# EAGLE board MTC2-N9151-BRK rev2-2a (Eagle) (EAGLE 7.5.0)
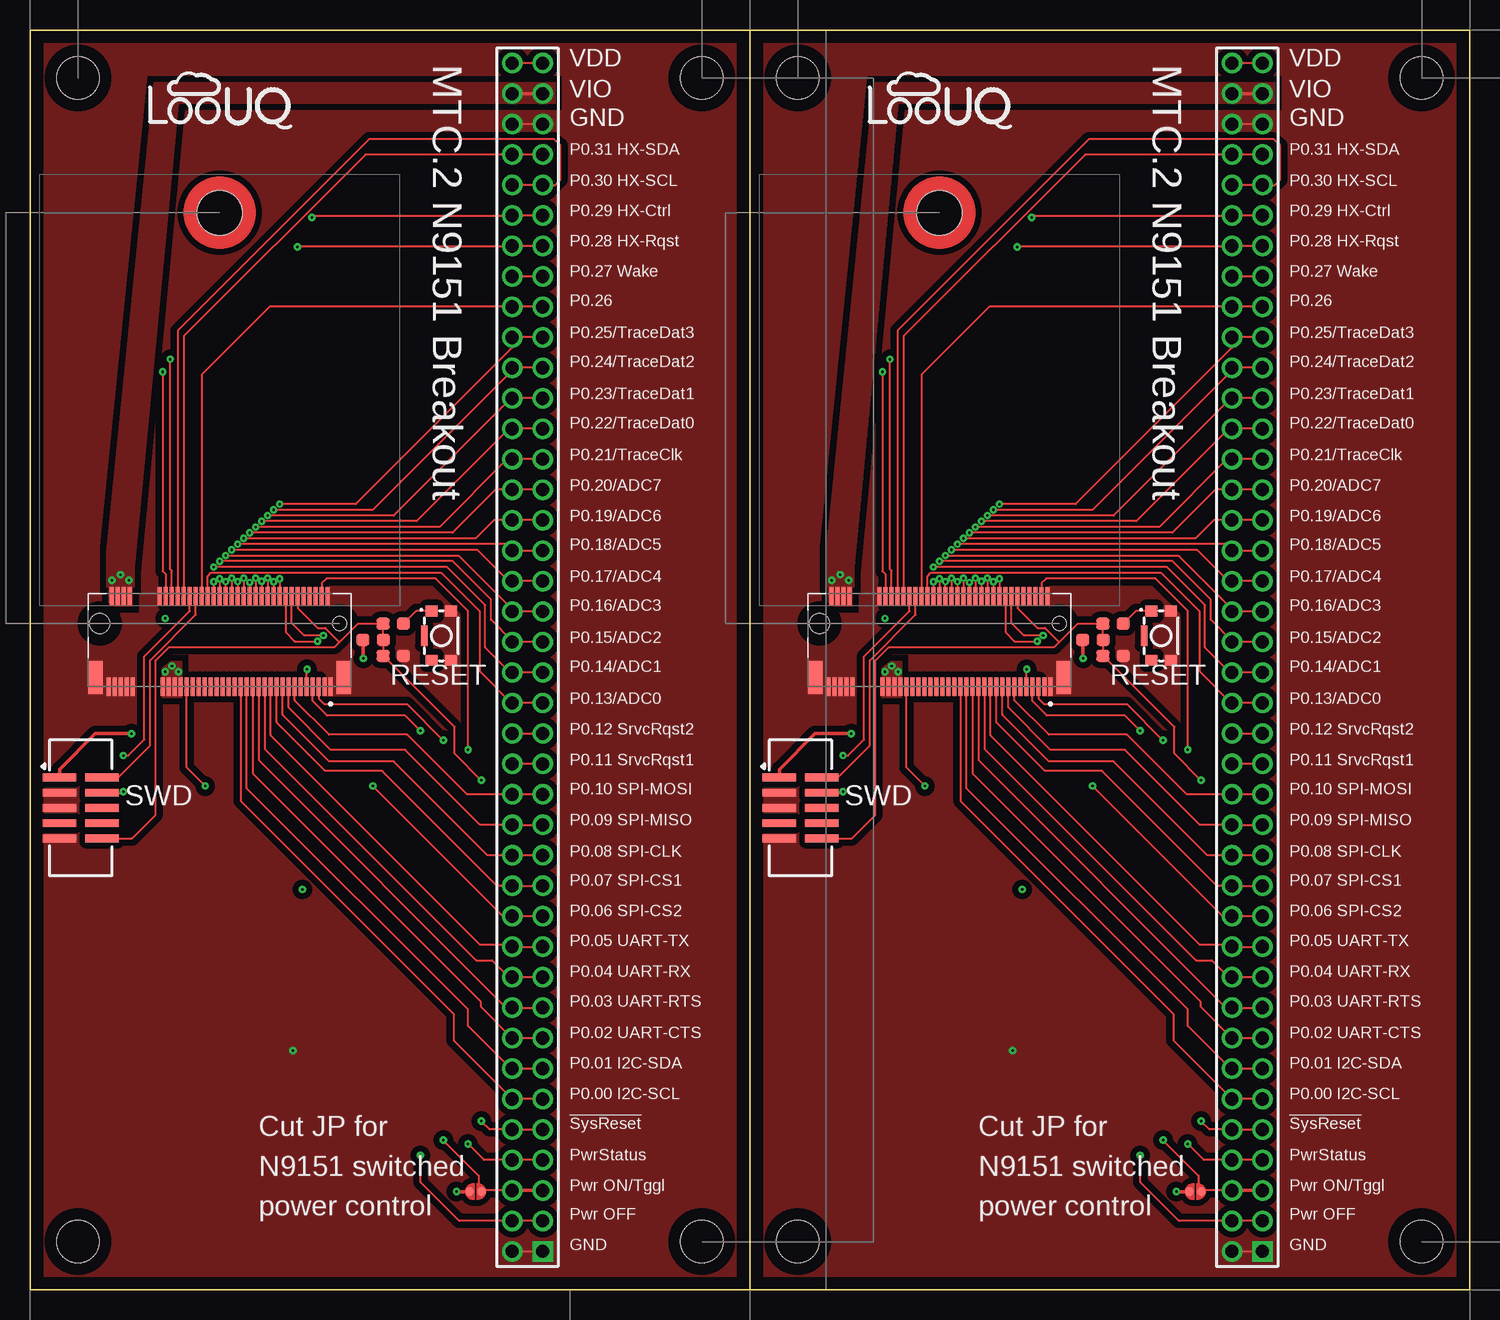
[diagram p0: board, top side]
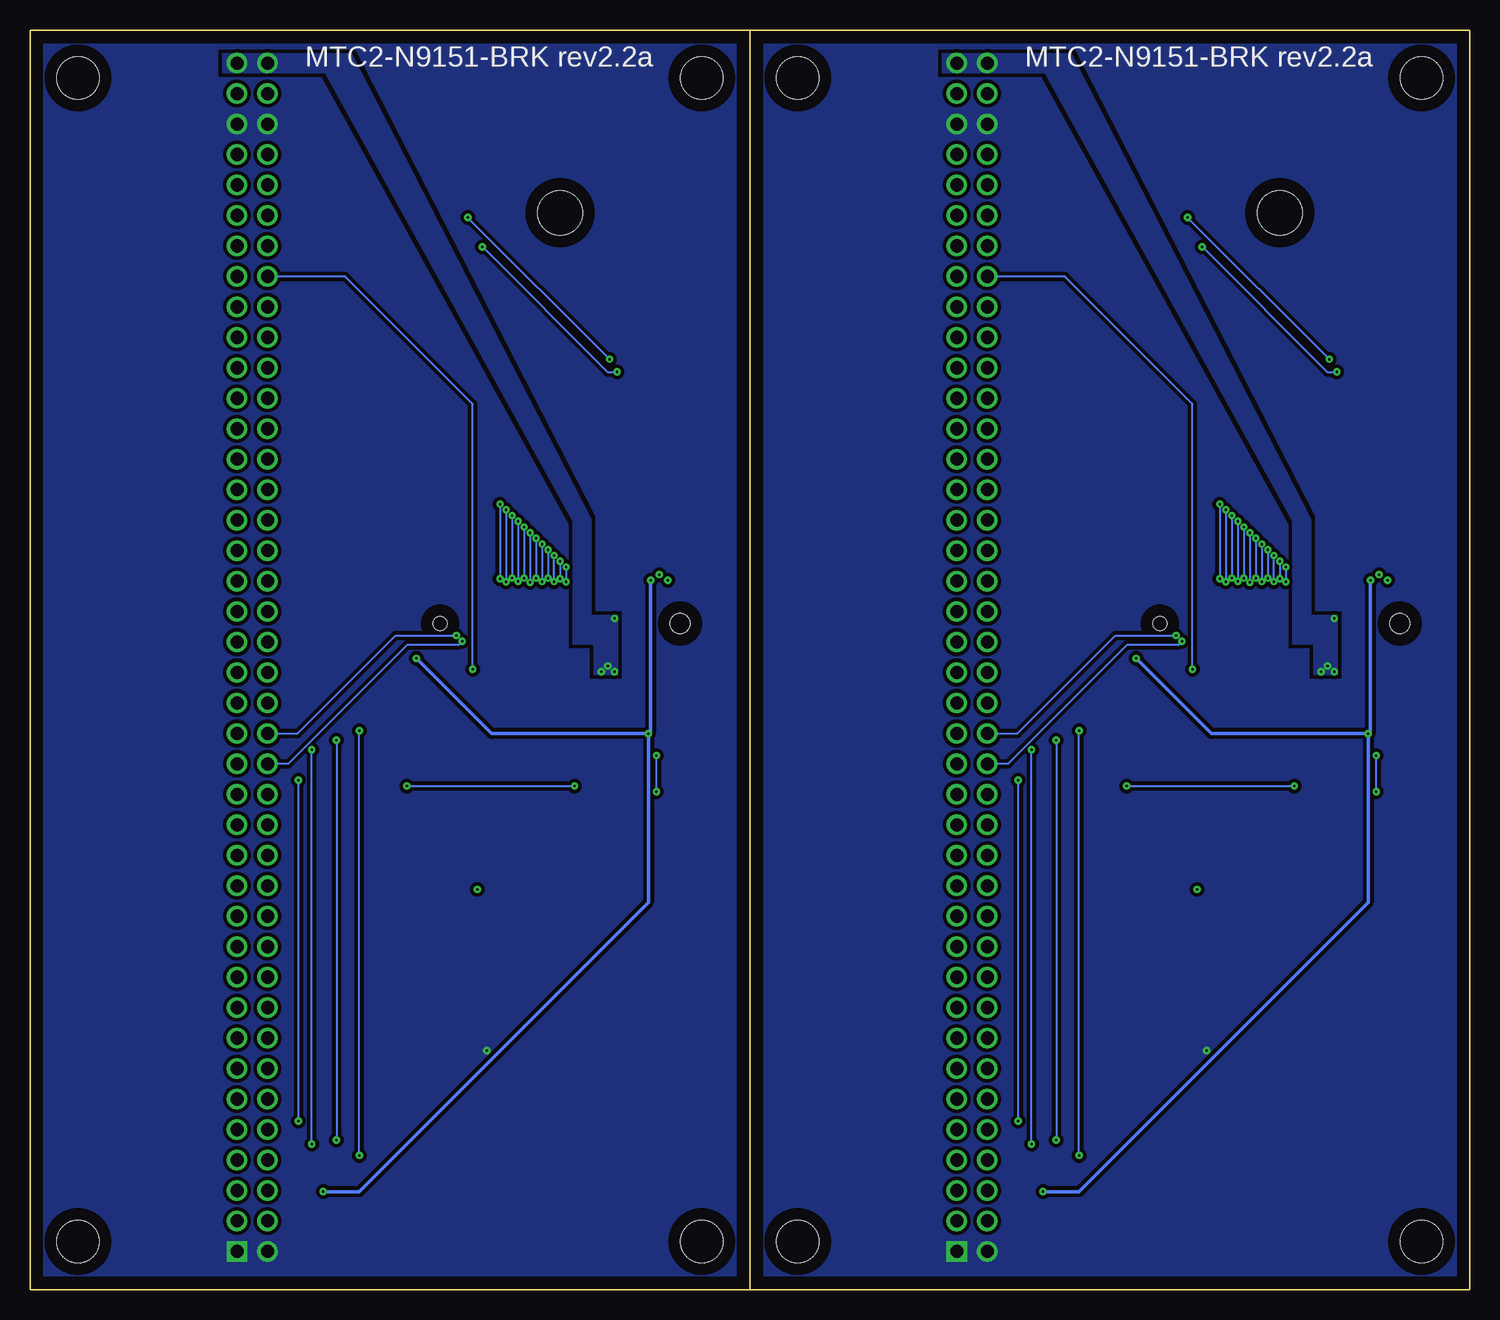
[diagram p1: board, bottom side, seen from below]

Size 120 x 105 mm. Coordinates in mm from the lower left corner, seen from the top.
Outline: 0,0 60,0
Outline: 60,0 60,105
Outline: 60,105 0,105
Outline: 0,105 0,0
Outline: 60,0 120,0 120,105 60,105
Outline: 60,105 60,0
Outline: 0,0 60,0
Outline: 60,0 60,105
Outline: 60,105 0,105
Outline: 0,105 0,0
Copper layers (1*16): Top 0.035mm / dielectric 1.5mm / Bottom 0.035mm
Design rules "default *": minimum track width 10mil, minimum drill 0.61mm, track to track 8mil, track to pad 8mil, pad to pad 8mil, via to via 8mil, smd to smd 8mil, copper to edge 40mil, drill to drill 8mil, minimum pad ring 0mil, minimum via ring 8mil, stop-mask expansion 2mil, vias tented up to drill 12mil, thermal gap 10mil
Net classes: 0 Default: width 0.18 mm, clearance 0.2 mm, clearance 0.2 mm to class 1, clearance 0.2 mm to class 2, clearance 0.2 mm to class 3; 1 Power: width 0.4 mm, clearance 0.2 mm, clearance 0.2 mm to class 0, clearance 0.2 mm to class 2, clearance 0.2 mm to class 3; 2 NetClass2: width 0.3 mm, clearance 0.2 mm, clearance 0.2 mm to class 0, clearance 0.2 mm to class 1, clearance 0.2 mm to class 3; 3 Power-HI: width 0.6 mm, clearance 0.2 mm, clearance 0.2 mm to class 0, clearance 0.2 mm to class 1, clearance 0.2 mm to class 2
Holes 3.5 mm at 4,4 56,4 4,101 56,101 64,4 116,4 64,101 116,101
Holes 2 mm at 127.5,102.25 -7.25,102.5 127.5,2.5 -7.5,2.5

## Footprints (pad centres in the part's own frame; a part is rotated, then mirrored left to right if it is on the bottom)
CAP_0603 = smd 1.1 x 1: 1 -0.85,0; 2 0.85,0
Fiducial = smd 0.75 x 0.75: FID1 0,0
CnCTech_3220-10-0300-00-TR = smd 0.65 x 2.77: 1 -2.54,-1.765; 2 -2.54,1.765; 3 -1.27,-1.765; 4 -1.27,1.765; 5 0,-1.765; 6 0,1.765; 7 1.27,-1.765; 8 1.27,1.765; 9 2.54,-1.765; 10 2.54,1.765
TE_1-2199230-6 = smd 0.3 x 1.55: 1 -9.25,5.275; 2 -9,-2.275; 3 -8.75,5.275; 4 -8.5,-2.275; 5 -8.25,5.275; 6 -8,-2.275; 7 -7.75,5.275; 8 -7.5,-2.275; 9 -7.25,5.275; 10 -7,-2.275; 11 -6.75,5.275; 12 -6.5,-2.275; 13 -6.25,5.275; 14 -6,-2.275; 15 -5.75,5.275; 16 -5.5,-2.275; 17 -5.25,5.275; 18 -5,-2.275; 19 -4.75,5.275; 20 -4.5,-2.275; 21 -4.25,5.275; 22 -4,-2.275; 23 -3.75,5.275; 24 -3.5,-2.275; 25 -3.25,5.275; 26 -3,-2.275; 27 -2.75,5.275; 28 -2.5,-2.275; 29 -2.25,5.275; 30 -2,-2.275; 31 -1.75,5.275; 32 -1.5,-2.275; 33 -1.25,5.275; 34 -1,-2.275; 35 -0.75,5.275; 36 -0.5,-2.275; 37 -0.25,5.275; 38 0,-2.275; 39 0.25,5.275; 40 0.5,-2.275; 41 0.75,5.275; 42 1,-2.275; 43 1.25,5.275; 44 1.5,-2.275; 45 1.75,5.275; 46 2,-2.275; 47 2.25,5.275; 48 2.5,-2.275; 49 2.75,5.275; 50 3,-2.275; 51 3.25,5.275; 52 3.5,-2.275; 53 3.75,5.275; 54 4,-2.275; 55 4.25,5.275; 56 4.5,-2.275; 57 4.75,5.275; 58 5,-2.275; 67 7.25,5.275; 68 7.5,-2.275; 69 7.75,5.275; 70 8,-2.275; 71 8.25,5.275; 72 8.5,-2.275; 73 8.75,5.275; 74 9,-2.275; 75 9.25,5.275 | smd 1.2 x 2.75: S1 -10.35,4.5; S2 10.35,4.5 | hole 1.15: -10,0 | hole 1.65: 10,0
HDR-2x40T/2.54x2.54/102x5 = drill 1.1 pad 1.7 square: 1 -49.53,-1.27 | drill 1.1 pad 1.7: 2 -49.53,1.27; 3 -46.99,-1.27; 4 -46.99,1.27; 5 -44.45,-1.27; 6 -44.45,1.27; 7 -41.91,-1.27; 8 -41.91,1.27; 9 -39.37,-1.27; 10 -39.37,1.27; 11 -36.83,-1.27; 12 -36.83,1.27; 13 -34.29,-1.27; 14 -34.29,1.27; 15 -31.75,-1.27; 16 -31.75,1.27; 17 -29.21,-1.27; 18 -29.21,1.27; 19 -26.67,-1.27; 20 -26.67,1.27; 21 -24.13,-1.27; 22 -24.13,1.27; 23 -21.59,-1.27; 24 -21.59,1.27; 25 -19.05,-1.27; 26 -19.05,1.27; 27 -16.51,-1.27; 28 -16.51,1.27; 29 -13.97,-1.27; 30 -13.97,1.27; 31 -11.43,-1.27; 32 -11.43,1.27; 33 -8.89,-1.27; 34 -8.89,1.27; 35 -6.35,-1.27; 36 -6.35,1.27; 37 -3.81,-1.27; 38 -3.81,1.27; 39 -1.27,-1.27; 40 -1.27,1.27; 41 1.27,-1.27; 42 1.27,1.27; 43 3.81,-1.27; 44 3.81,1.27; 45 6.35,-1.27; 46 6.35,1.27; 47 8.89,-1.27; 48 8.89,1.27; 49 11.43,-1.27; 50 11.43,1.27; 51 13.97,-1.27; 52 13.97,1.27; 53 16.51,-1.27; 54 16.51,1.27; 55 19.05,-1.27; 56 19.05,1.27; 57 21.59,-1.27; 58 21.59,1.27; 59 24.13,-1.27; 60 24.13,1.27; 61 26.67,-1.27; 62 26.67,1.27; 63 29.21,-1.27; 64 29.21,1.27; 65 31.75,-1.27; 66 31.75,1.27; 67 34.29,-1.27; 68 34.29,1.27; 69 36.83,-1.27; 70 36.83,1.27; 71 39.37,-1.27; 72 39.37,1.27; 73 41.91,-1.27; 74 41.91,1.27; 75 44.45,-1.27; 76 44.45,1.27; 77 46.99,-1.27; 78 46.99,1.27; 79 49.53,-1.27; 80 49.53,1.27
Circ-Jumper-2 = smd 0.7 x 0.7: 1 -0.479,0; 2 0.484,0
m.2_standoff = hole 3.7: 0,0
RES_0603 = smd 1.1 x 1: 1 -0.85,0; 2 0.85,0
RES_0603_R2 = smd 1.1 x 1: 1 -0.85,0; 2 0.85,0
KMR-2-wG = smd 0.9 x 1: 1@ -2.05,0.4; 1@_1 2.05,0.4; 2@ 2.05,-1.2; 2@_1 -2.05,-1.2 | smd 1.7 x 0.55: S 0,1.025

## Placement (x,y rotation side)
C1_1_1  4.7uF  [CAP_0603]  30.28,52.82 180 top
C1_2_1  4.7uF  [CAP_0603]  90.28,52.82 180 top
FID1  FIDUCIAL  [Fiducial]  127.5,97.5 0 top  (outside the outline)
FID2  FIDUCIAL  [Fiducial]  -7.5,97.5 0 top  (outside the outline)
FID3  FIDUCIAL  [Fiducial]  127.5,7.5 0 top  (outside the outline)
FID4  FIDUCIAL  [Fiducial]  -7.5,7.5 0 top  (outside the outline)
J1_1_1  CNCTECH 3220-10-0300-00-TR  [CnCTech_3220-10-0300-00-TR]  4.23,40.14 270 top
J1_2_1  CNCTECH 3220-10-0300-00-TR  [CnCTech_3220-10-0300-00-TR]  64.23,40.14 270 top
J5_1_1  MTC.2 1-2199230-6 (N9151)  [TE_1-2199230-6]  15.82,55.51 180 top
J5_2_1  MTC.2 1-2199230-6 (N9151)  [TE_1-2199230-6]  75.82,55.51 180 top
J9_1_1  90131-0160  [HDR-2x40T/2.54x2.54/102x5]  41.47,52.71 90 top
J9_2_1  90131-0160  [HDR-2x40T/2.54x2.54/102x5]  101.47,52.71 90 top
JP1_1_1  CIRCJUMPER-2  [Circ-Jumper-2]  37.15,8.17 180 top
JP1_2_1  CIRCJUMPER-2  [Circ-Jumper-2]  97.15,8.17 180 top
LG1_1_1  LOOUQ LOGO  [LooUQ-6mm]  15.88,99.07 0 top
LG1_2_1  LOOUQ LOGO  [LooUQ-6mm]  75.88,99.07 0 top
MH1_1_1  9774025151R  [m.2_standoff]  15.82,89.76 90 top
MH1_2_1  9774025151R  [m.2_standoff]  75.82,89.76 90 top
R1_1_1  10K  [RES_0603]  28.61,54.15 180 top
R1_2_1  10K  [RES_0603]  88.61,54.15 180 top
R2_1_1  330R  [RES_0603_R2]  30.28,55.51 0 top
R2_2_1  330R  [RES_0603_R2]  90.28,55.51 0 top
SW1_1_1  KMR221GLFS  [KMR-2-wG]  33.89,54.5 90 top
SW1_2_1  KMR221GLFS  [KMR-2-wG]  93.89,54.5 90 top

## Library data of the parts
C1_1_1 C1_2_1 = common; MANUFACTURER: Samsung; MFGPARTNM: CAP CER 4.7UF 10V X5R 0603
FID1-FID4 = common
J1_1_1 J1_2_1 = common; MANUFACTURER: CnCTech
J5_1_1 J5_2_1 = common; AVAILABILITY: In Stock; CENTERLINE_PITCH: .5 mm[.0197 in]; CHECK_PRICES: https://www.snapeda.com/parts/1-2199230-6/TE+Connectivity+AMP+Connectors/view-part/?ref=eda; COMMENT: 1-2199230-6; DATASHEET: https://www.te.com/commerce/DocumentDelivery/DDEController?Action=srchrtrv&DocNm=1-1773702-1NGFFQRG-EN&DocType=Data%20Sheet&DocLang=English&DocFormat=pdf&PartCntxt=1-2199230-6; DESCRIPTION: 67 Position Female Connector M.2 (NGFF) Mini Card Gold 0.020 (0.50mm) Black; DRAWING: https://www.te.com/commerce/DocumentDelivery/DDEController?Action=srchrtrv&DocNm=114-115006&DocType=Specification%20Or%20Standard&DocLang=English&DocFormat=pdf&PartCntxt=1-2199230-6; MANUFACTURER: TE Connectivity; MF: TE Connectivity; MP: 1-2199230-6; NUMBER_OF_POSITIONS: 67; PACKAGE: None; PRICE: None; PRODUCT_TYPE: Socket; SNAPEDA_LINK: https://www.snapeda.com/parts/1-2199230-6/TE+Connectivity+AMP+Connectors/view-part/?ref=snap
J9_1_1 J9_2_1 = common; DATASHEET: http://datasheets.diptrace.com/con_headers/901310126_sd.pdf; MANUFACTURER: Molex
JP1_1_1 JP1_2_1 = common; MOUNT: TR
LG1_1_1 LG1_2_1 = common; DESCRIPTION: LooUQ logo silk; MANUFACTURER: PCB; MOUNT: SLK
MH1_1_1 MH1_2_1 = common; DATASHEET: https://www.we-online.com/components/products/datasheet/9774025151R.pdf; MANUFACTURER: Wurth
R1_1_1 R1_2_1 = common; MANUFACTURER: Stackpole
R2_1_1 R2_2_1 = common; MANUFACTURER: Walsin Technology
SW1_1_1 SW1_2_1 = common; CLASS: Switch; DATASHEET: https://www.ckswitches.com/media/1479/kmr2.pdf; DESCRIPTION: Tactile Switch SPST-NO Top Actuated Surface Mount, GndPin, 300gf; MANUFACTURER: C&K

## Nets
ND_RESETSW: R2_1_1.2 R2_2_1.2 SW1_1_1.1@ SW1_1_1.1@_1 SW1_2_1.1@ SW1_2_1.1@_1
Net_GND: C1_1_1.1 C1_2_1.1 J1_1_1.3 J1_1_1.5 J1_1_1.9 J1_2_1.3 J1_2_1.5 J1_2_1.9 J5_1_1.1 J5_1_1.2 J5_1_1.3 J5_1_1.58 J5_1_1.67 J5_1_1.69 J5_1_1.71 J5_1_1.73 J5_1_1.75 J5_1_1.S1 J5_1_1.S2 J5_2_1.1 J5_2_1.2 J5_2_1.3 J5_2_1.58 J5_2_1.67 J5_2_1.69 J5_2_1.71 J5_2_1.73 J5_2_1.75 J5_2_1.S1 J5_2_1.S2 J9_1_1.1 J9_1_1.2 J9_1_1.75 J9_1_1.76 J9_2_1.1 J9_2_1.2 J9_2_1.75 J9_2_1.76 SW1_1_1.2@ SW1_1_1.2@_1 SW1_2_1.2@ SW1_2_1.2@_1
Net_PWR-TGL: J5_1_1.5 J5_2_1.5 J9_1_1.5 J9_1_1.6 J9_2_1.5 J9_2_1.6 JP1_1_1.1 JP1_2_1.1
Net_SWCLK: J1_1_1.4 J1_2_1.4 J5_1_1.48 J5_2_1.48
Net_SWIO: J1_1_1.2 J1_2_1.2 J5_1_1.46 J5_2_1.46
Net_VDD: J5_1_1.51 J5_1_1.53 J5_1_1.55 J5_1_1.57 J5_2_1.51 J5_2_1.53 J5_2_1.55 J5_2_1.57 J9_1_1.79 J9_1_1.80 J9_2_1.79 J9_2_1.80
Net_VIO [NetClass2]: J1_1_1.1 J1_2_1.1 J5_1_1.68 J5_1_1.70 J5_1_1.72 J5_1_1.74 J5_2_1.68 J5_2_1.70 J5_2_1.72 J5_2_1.74 J9_1_1.77 J9_1_1.78 J9_2_1.77 J9_2_1.78 JP1_1_1.2 JP1_2_1.2 R1_1_1.2 R1_2_1.2
nSysReset: C1_1_1.2 C1_2_1.2 J1_1_1.10 J1_2_1.10 J5_1_1.12 J5_2_1.12 J9_1_1.9 J9_1_1.10 J9_2_1.9 J9_2_1.10 R1_1_1.1 R1_2_1.1 R2_1_1.1 R2_2_1.1
P0.01_(I2C-SCL): J5_1_1.31 J5_2_1.31 J9_1_1.11 J9_1_1.12 J9_2_1.11 J9_2_1.12
P0.01_(I2C-SDA): J5_1_1.29 J5_2_1.29 J9_1_1.13 J9_1_1.14 J9_2_1.13 J9_2_1.14
P0.02_(UART-CTS): J5_1_1.27 J5_2_1.27 J9_1_1.15 J9_1_1.16 J9_2_1.15 J9_2_1.16
P0.03_(UART-RTS): J5_1_1.25 J5_2_1.25 J9_1_1.17 J9_1_1.18 J9_2_1.17 J9_2_1.18
P0.04_(UART-RX): J5_1_1.23 J5_2_1.23 J9_1_1.19 J9_1_1.20 J9_2_1.19 J9_2_1.20
P0.05_(UART-TX): J5_1_1.21 J5_2_1.21 J9_1_1.21 J9_1_1.22 J9_2_1.21 J9_2_1.22
P0.06_(SPI-CS2): J5_1_1.49 J5_2_1.49 J9_1_1.23 J9_1_1.24 J9_2_1.23 J9_2_1.24
P0.07_(SPI-CS1): J5_1_1.19 J5_2_1.19 J9_1_1.25 J9_1_1.26 J9_2_1.25 J9_2_1.26
P0.08_(SPI-CLK): J5_1_1.17 J5_2_1.17 J9_1_1.27 J9_1_1.28 J9_2_1.27 J9_2_1.28
P0.09_(SPI-MISO): J5_1_1.15 J5_2_1.15 J9_1_1.29 J9_1_1.30 J9_2_1.29 J9_2_1.30
P0.10_(SPI-MOSI): J5_1_1.13 J5_2_1.13 J9_1_1.31 J9_1_1.32 J9_2_1.31 J9_2_1.32
P0.11_(nSrvcRqst1): J5_1_1.16 J5_2_1.16 J9_1_1.33 J9_1_1.34 J9_2_1.33 J9_2_1.34
P0.12_(nSrvcRqst2): J5_1_1.14 J5_2_1.14 J9_1_1.35 J9_1_1.36 J9_2_1.35 J9_2_1.36
P0.13/ADC0: J5_1_1.42 J5_2_1.42 J9_1_1.37 J9_1_1.38 J9_2_1.37 J9_2_1.38
P0.14/ADC1: J5_1_1.40 J5_2_1.40 J9_1_1.39 J9_1_1.40 J9_2_1.39 J9_2_1.40
P0.15/ADC2: J5_1_1.38 J5_2_1.38 J9_1_1.41 J9_1_1.42 J9_2_1.41 J9_2_1.42
P0.16/ADC3: J5_1_1.36 J5_2_1.36 J9_1_1.43 J9_1_1.44 J9_2_1.43 J9_2_1.44
P0.17/ADC4: J5_1_1.34 J5_2_1.34 J9_1_1.45 J9_1_1.46 J9_2_1.45 J9_2_1.46
P0.18/ADC5: J5_1_1.32 J5_2_1.32 J9_1_1.47 J9_1_1.48 J9_2_1.47 J9_2_1.48
P0.19/ADC6: J5_1_1.30 J5_2_1.30 J9_1_1.49 J9_1_1.50 J9_2_1.49 J9_2_1.50
P0.20/ADC7: J5_1_1.28 J5_2_1.28 J9_1_1.51 J9_1_1.52 J9_2_1.51 J9_2_1.52
P0.21/TRACECLK: J5_1_1.26 J5_2_1.26 J9_1_1.53 J9_1_1.54 J9_2_1.53 J9_2_1.54
P0.22/TRACED0: J5_1_1.24 J5_2_1.24 J9_1_1.55 J9_1_1.56 J9_2_1.55 J9_2_1.56
P0.23/TRACED1: J5_1_1.22 J5_2_1.22 J9_1_1.57 J9_1_1.58 J9_2_1.57 J9_2_1.58
P0.24/TRACED2: J5_1_1.20 J5_2_1.20 J9_1_1.59 J9_1_1.60 J9_2_1.59 J9_2_1.60
P0.25/TRACED3: J5_1_1.18 J5_2_1.18 J9_1_1.61 J9_1_1.62 J9_2_1.61 J9_2_1.62
P0.26: J5_1_1.44 J5_2_1.44 J9_1_1.63 J9_1_1.64 J9_2_1.63 J9_2_1.64
P0.27_(Wake): J5_1_1.9 J5_2_1.9 J9_1_1.65 J9_1_1.66 J9_2_1.65 J9_2_1.66
P0.28_(HX-RQST): J5_1_1.56 J5_2_1.56 J9_1_1.67 J9_1_1.68 J9_2_1.67 J9_2_1.68
P0.29_(HX-PGOOD): J5_1_1.54 J5_2_1.54 J9_1_1.69 J9_1_1.70 J9_2_1.69 J9_2_1.70
P0.30_HX-SCL: J5_1_1.52 J5_2_1.52 J9_1_1.71 J9_1_1.72 J9_2_1.71 J9_2_1.72
P0.31_HX-SDA: J5_1_1.50 J5_2_1.50 J9_1_1.73 J9_1_1.74 J9_2_1.73 J9_2_1.74
PWR-OFF: J5_1_1.7 J5_2_1.7 J9_1_1.3 J9_1_1.4 J9_2_1.3 J9_2_1.4
Status-ON/OFF: J5_1_1.4 J5_2_1.4 J9_1_1.7 J9_1_1.8 J9_2_1.7 J9_2_1.8

## Tracks (layer width: path | path; a pad name or v marks a point on that pad's centre or on a via)
ND_RESETSW
  Top 0.18: 32.17,56.55 SW1_1_1.1@_1 32.17,56.55 | 32.17,56.55 R2_1_1.2 32.17,56.55 | SW1_2_1.1@_1 92.17,56.55 R2_2_1.2
Net_GND  (via drill 0.2 pad 0.4)
  Top 0.18: J9_2_1.75 J9_2_1.76 | J9_2_1.2 J9_2_1.1 | J9_1_1.75 J9_1_1.76 J9_1_1.75 | J9_1_1.2 J9_1_1.1 J9_1_1.2
  other vias: 21.91,19.91 81.91,19.91
  pour Top (isolate 0.508, rank 3): 0.53,0.53 59.47,0.53 59.47,104.47 0.53,104.47
  pour Bottom (isolate 0.3, rank 2): 0.53,0.53 59.48,0.53 59.48,104.47 0.53,104.47
  pour Top (isolate 0.508, rank 3): 60.53,0.53 119.47,0.53 119.47,104.47 60.53,104.47
  pour Bottom (isolate 0.3, rank 2): 60.52,0.53 119.47,0.53 119.47,104.47 60.52,104.47
Net_PWR-TGL  (via drill 0.2 pad 0.4)
  Top 0.18: 37.72,8.26 J9_1_1.6 37.72,8.26 | 37.72,8.26 JP1_1_1.1 | 24.07,49.26 J5_1_1.5 24.07,49.26 | 24.07,49.26 24.52,48.8 | 24.52,48.8 31.43,48.8 | 31.43,48.8 v34.45,45.79 31.43,48.8 | 37.41,9.49 v34.45,12.45 37.41,9.49 | 37.41,9.49 37.41,8.17 | 37.41,8.17 JP1_1_1.1 | J9_2_1.6 97.72,8.26 JP1_2_1.1 97.41,8.17 97.41,9.49 v94.45,12.45 | J5_2_1.5 84.06,49.26 84.52,48.8 91.43,48.8 v94.45,45.79 | 37.72,8.26 JP1_1_1.1 | 24.07,49.26 24.52,48.8 | 24.52,48.8 31.43,48.8 | 37.41,9.49 37.41,8.17 | 37.41,8.17 JP1_1_1.1
  Top 0.3: J9_2_1.6 J9_2_1.5 | J9_1_1.6 J9_1_1.5 J9_1_1.6
  Bottom 0.18: v94.45,45.79 v94.45,12.45 | v34.45,45.79 v34.45,12.45 v34.45,45.79
Net_SWCLK  (via drill 0.2 pad 0.4)
  Top 0.18: 7.69,41.41 J1_1_1.4 7.69,41.41 | 7.69,41.41 v7.78,41.5 7.69,41.41 | 8.2,44.52 v7.78,44.52 8.2,44.52 | 8.2,44.52 9.53,45.85 | 9.53,45.85 9.53,52.77 | 9.53,52.77 13.31,56.56 | 13.31,56.56 J5_1_1.48 13.31,56.56 | J1_2_1.4 67.69,41.41 v67.78,41.5 | v67.78,44.52 68.19,44.52 69.53,45.85 69.53,52.77 73.31,56.56 J5_2_1.48 | 8.2,44.52 9.53,45.85 | 9.53,45.85 9.53,52.77 | 9.53,52.77 13.31,56.56
  Bottom 0.18: v67.78,41.5 v67.78,44.52 | v7.78,41.5 v7.78,44.52 v7.78,41.5
Net_SWIO
  Top 0.18: 7.35,42.69 J1_1_1.2 7.35,42.69 | 7.35,42.69 10,45.34 | 10,45.34 10,52.45 | 10,52.45 13.81,56.27 | 13.81,56.27 J5_1_1.46 13.81,56.27 | J1_2_1.2 67.35,42.69 70,45.34 70,52.45 73.81,56.27 J5_2_1.46 | 7.35,42.69 10,45.34 | 10,45.34 10,52.45 | 10,52.45 13.81,56.27
Net_VDD  (via drill 0.2 pad 0.4)
  Top 0.18: J9_2_1.79 J9_2_1.80 | J9_1_1.79 J9_1_1.80 J9_1_1.79
  other vias: 11.83,51.98 12.38,51.5 11.27,51.5 11.27,55.95 71.83,51.98 72.38,51.5 71.27,51.5 71.27,55.95
  pour Bottom (isolate 0.25, no thermals): 43.92,101.4 43.92,103.05 33.21,103.05 13.23,64.19 13.23,56.21 11,56.21 11,51.23 12.97,51.23 12.97,53.77 14.71,53.77 14.71,64.06 35.37,101.4
  pour Top (isolate 0.25, rank 2, no thermals): 12.65,49.33 11,49.33 11,51.79 11.77,52.4 12.65,52.4
  pour Bottom (isolate 0.25, no thermals): 103.92,101.4 103.92,103.05 93.21,103.05 73.23,64.19 73.23,56.21 71,56.21 71,51.23 72.97,51.23 72.97,53.77 74.71,53.77 74.71,64.06 95.37,101.4
  pour Top (isolate 0.25, rank 2, no thermals): 72.65,49.33 71,49.33 71,51.79 71.77,52.4 72.65,52.4
Net_VIO  (via drill 0.2 pad 0.4)
  Top 0.3: 2.47,43.36 J1_1_1.1 2.47,43.36 | 2.47,43.36 5.45,46.34 | 5.45,46.34 v8.45,46.34 5.45,46.34 | 27.76,52.64 v27.78,52.61 27.76,52.64 | 27.76,52.64 R1_1_1.2 27.76,52.64 | JP1_1_1.2 v35.56,8.16 JP1_1_1.2 | JP1_1_1.2 | J9_2_1.77 J9_2_1.78 | J1_2_1.1 62.47,43.36 65.45,46.34 v68.45,46.34 | v87.78,52.61 87.76,52.64 R1_2_1.2 | v95.56,8.16 JP1_2_1.2 | 2.47,43.36 5.45,46.34 | J9_1_1.77 J9_1_1.78 J9_1_1.77
  Bottom 0.3: 8.26,46.54 v8.26,59.12 8.26,46.54 | 8.26,46.54 v8.45,46.34 | v8.45,46.34 21.51,46.34 | 21.51,46.34 v27.78,52.61 21.51,46.34 | v8.45,46.34 8.45,32.26 | 8.45,32.26 32.54,8.16 | 32.54,8.16 v35.56,8.16 32.54,8.16 | v68.25,59.12 68.25,46.54 v68.45,46.34 | v68.45,46.34 81.51,46.34 v87.78,52.61 | v68.45,46.34 68.45,32.26 92.54,8.16 v95.56,8.16 | 8.26,46.54 v8.45,46.34 | v8.45,46.34 21.51,46.34 | v8.45,46.34 8.45,32.26 | 8.45,32.26 32.54,8.16
  other vias: 6.83,59.12 7.54,59.6 66.83,59.12 67.54,59.6
  pour Top (isolate 0.25, rank 2, no thermals): 6.56,56.95 6.56,59.87 8.52,59.87 8.52,56.95
  pour Top (isolate 0.25, rank 2, no thermals): 43.77,98.86 12.34,98.86 8.68,60.23 8.68,58.54 6.4,58.54 6.4,61.5 10.36,100.66 43.77,100.66
  pour Top (isolate 0.25, rank 2, no thermals): 66.56,56.95 66.56,59.87 68.52,59.87 68.52,56.95
  pour Top (isolate 0.25, rank 2, no thermals): 103.77,98.86 72.34,98.86 68.68,60.23 68.68,58.54 66.4,58.54 66.4,61.5 70.36,100.66 103.77,100.66
nSysReset  (via drill 0.2 pad 0.4)
  Top 0.18: R1_1_1.1 29.46,55.49 | 29.46,55.49 R2_1_1.1 | R1_1_1.1 29.46,52.84 | 29.46,52.84 C1_1_1.2 | J9_1_1.10 J9_1_1.9 J9_1_1.10 | 8.52,37.61 J1_1_1.10 8.52,37.61 | 8.52,37.61 10.48,39.56 | 10.48,39.56 10.48,52.45 | 10.48,52.45 11.58,53.56 | 11.58,53.56 25.39,53.56 | 25.39,53.56 25.88,54.04 | 25.88,54.04 27.34,55.51 | 27.34,55.51 R2_1_1.1 | J9_1_1.10 38.32,13.34 | 38.32,13.34 v37.62,14.04 38.32,13.34 | 22.32,56.81 J5_1_1.12 22.32,56.81 | 22.32,56.81 23.97,55.15 | 23.97,55.15 24.61,55.15 | 24.61,55.15 25.72,54.04 | 25.72,54.04 25.88,54.04 | 35.4,44.67 v37.62,42.45 35.4,44.67 | 35.4,44.67 35.4,46.9 | 35.4,46.9 29.48,52.82 | 29.48,52.82 C1_1_1.2 | J9_2_1.9 J9_2_1.10 98.32,13.34 v97.62,14.04 | J1_2_1.10 68.52,37.61 70.48,39.56 70.48,52.45 71.58,53.56 85.39,53.56 85.88,54.04 | 85.88,54.04 87.34,55.51 R2_2_1.1 89.46,55.49 R1_2_1.1 89.46,52.84 C1_2_1.2 89.48,52.82 95.4,46.9 95.4,44.67 v97.62,42.45 | J5_2_1.12 82.31,56.81 83.97,55.15 84.61,55.15 85.72,54.04 85.88,54.04 | R1_1_1.1 29.46,55.49 | 29.46,55.49 R2_1_1.1 | R1_1_1.1 29.46,52.84 | 29.46,52.84 C1_1_1.2 | 8.52,37.61 10.48,39.56 | 10.48,39.56 10.48,52.45 | 10.48,52.45 11.58,53.56 | 11.58,53.56 25.39,53.56 | 25.39,53.56 25.88,54.04 | 25.88,54.04 27.34,55.51 | 27.34,55.51 R2_1_1.1 | J9_1_1.10 38.32,13.34 | 22.32,56.81 23.97,55.15 | 23.97,55.15 24.61,55.15 | 24.61,55.15 25.72,54.04 | 25.72,54.04 25.88,54.04 | 35.4,44.67 35.4,46.9 | 35.4,46.9 29.48,52.82 | 29.48,52.82 C1_1_1.2
  Bottom 0.18: v97.62,14.04 v97.62,42.45 | v37.62,14.04 v37.62,42.45 v37.62,14.04
P0.01_(I2C-SCL)
  Top 0.18: J9_1_1.12 J9_1_1.11 J9_1_1.12 | 17.57,40.72 J5_1_1.31 17.57,40.72 | 17.57,40.72 35.31,22.97 | 35.31,22.97 35.31,20.76 | 35.31,20.76 J9_1_1.12 | J9_2_1.11 J9_2_1.12 95.31,20.76 95.31,22.97 77.56,40.72 J5_2_1.31 | 17.57,40.72 35.31,22.97 | 35.31,22.97 35.31,20.76 | 35.31,20.76 J9_1_1.12
P0.01_(I2C-SDA)
  Top 0.18: J9_1_1.14 J9_1_1.13 J9_1_1.14 | J9_1_1.14 40.07,18.42 | 40.07,18.42 36.51,21.97 | 36.51,21.97 36.51,23.34 | 36.51,23.34 18.07,41.78 | 18.07,41.78 J5_1_1.29 18.07,41.78 | J9_2_1.13 J9_2_1.14 100.07,18.42 96.51,21.97 96.51,23.34 78.06,41.78 J5_2_1.29 | J9_1_1.14 40.07,18.42 | 40.07,18.42 36.51,21.97 | 36.51,21.97 36.51,23.34 | 36.51,23.34 18.07,41.78
P0.02_(UART-CTS)
  Top 0.18: J9_1_1.16 J9_1_1.15 J9_1_1.16 | 18.57,43.02 J5_1_1.27 18.57,43.02 | 18.57,43.02 37.57,24.02 | 37.57,24.02 37.57,23.58 | 37.57,23.58 J9_1_1.16 | J9_2_1.15 J9_2_1.16 97.57,23.58 97.57,24.02 78.56,43.02 J5_2_1.27 | 18.57,43.02 37.57,24.02 | 37.57,24.02 37.57,23.58 | 37.57,23.58 J9_1_1.16
P0.03_(UART-RTS)
  Top 0.18: J9_1_1.18 J9_1_1.17 J9_1_1.18 | 19.07,44.13 J5_1_1.25 19.07,44.13 | 19.07,44.13 39.7,23.5 | 39.7,23.5 J9_1_1.18 | J9_2_1.17 J9_2_1.18 99.7,23.5 79.06,44.13 J5_2_1.25 | 19.07,44.13 39.7,23.5 | 39.7,23.5 J9_1_1.18
P0.04_(UART-RX)
  Top 0.18: J9_1_1.20 J9_1_1.19 J9_1_1.20 | 19.57,45.07 J5_1_1.23 19.57,45.07 | 19.57,45.07 37.2,27.44 | 37.2,27.44 38.52,27.44 | 38.52,27.44 39.92,26.04 | 39.92,26.04 J9_1_1.20 | J9_2_1.19 J9_2_1.20 99.92,26.04 98.52,27.44 97.19,27.44 79.56,45.07 J5_2_1.23 | 19.57,45.07 37.2,27.44 | 37.2,27.44 38.52,27.44 | 38.52,27.44 39.92,26.04 | 39.92,26.04 J9_1_1.20
P0.05_(UART-TX)
  Top 0.18: J9_1_1.22 J9_1_1.21 J9_1_1.22 | J9_1_1.22 39.91,28.58 | 39.91,28.58 39.74,28.74 | 39.74,28.74 37.52,28.74 | 37.52,28.74 20.07,46.2 | 20.07,46.2 J5_1_1.21 20.07,46.2 | J9_2_1.21 J9_2_1.22 99.91,28.58 99.74,28.74 97.52,28.74 80.06,46.2 J5_2_1.21 | J9_1_1.22 39.91,28.58 | 39.91,28.58 39.74,28.74 | 39.74,28.74 37.52,28.74 | 37.52,28.74 20.07,46.2
P0.06_(SPI-CS2)  (via drill 0.2 pad 0.4)
  Top 0.18: J9_1_1.24 J9_1_1.23 J9_1_1.24 | J9_1_1.24 39.43,31.12 | 39.43,31.12 v28.57,41.98 39.43,31.12 | 13.06,43.52 v14.61,41.98 13.06,43.52 | 13.06,43.52 J5_1_1.49 13.06,43.52 | J9_2_1.23 J9_2_1.24 99.43,31.12 v88.58,41.98 | v74.61,41.98 73.06,43.52 J5_2_1.49 | J9_1_1.24 39.43,31.12
  Bottom 0.18: v88.58,41.98 v74.61,41.98 | v28.57,41.98 v14.61,41.98 v28.57,41.98
P0.07_(SPI-CS1)
  Top 0.18: J9_1_1.26 J9_1_1.25 J9_1_1.26 | J9_1_1.26 38.96,33.66 | 38.96,33.66 29.37,43.25 | 29.37,43.25 24.61,43.25 | 24.61,43.25 20.57,47.29 | 20.57,47.29 J5_1_1.19 20.57,47.29 | J9_2_1.25 J9_2_1.26 98.96,33.66 89.37,43.25 84.61,43.25 80.56,47.29 J5_2_1.19 | J9_1_1.26 38.96,33.66 | 38.96,33.66 29.37,43.25 | 29.37,43.25 24.61,43.25 | 24.61,43.25 20.57,47.29
P0.08_(SPI-CLK)
  Top 0.18: J9_1_1.28 J9_1_1.27 J9_1_1.28 | J9_1_1.28 38.16,36.2 | 38.16,36.2 30.32,44.04 | 30.32,44.04 24.92,44.04 | 24.92,44.04 21.07,47.9 | 21.07,47.9 J5_1_1.17 21.07,47.9 | J9_2_1.27 J9_2_1.28 98.16,36.2 90.32,44.04 84.92,44.04 81.06,47.9 J5_2_1.17 | J9_1_1.28 38.16,36.2 | 38.16,36.2 30.32,44.04 | 30.32,44.04 24.92,44.04 | 24.92,44.04 21.07,47.9
P0.09_(SPI-MISO)
  Top 0.18: J9_1_1.30 J9_1_1.29 J9_1_1.30 | J9_1_1.30 37.53,38.74 | 37.53,38.74 31.27,44.99 | 31.27,44.99 25.08,44.99 | 25.08,44.99 21.57,48.51 | 21.57,48.51 J5_1_1.15 21.57,48.51 | J9_2_1.29 J9_2_1.30 97.53,38.74 91.27,44.99 85.08,44.99 81.56,48.51 J5_2_1.15 | J9_1_1.30 37.53,38.74 | 37.53,38.74 31.27,44.99 | 31.27,44.99 25.08,44.99 | 25.08,44.99 21.57,48.51
P0.10_(SPI-MOSI)
  Top 0.18: J9_1_1.32 J9_1_1.31 J9_1_1.32 | J9_1_1.32 36.42,41.28 | 36.42,41.28 31.43,46.26 | 31.43,46.26 24.92,46.26 | 24.92,46.26 22.07,49.12 | 22.07,49.12 J5_1_1.13 22.07,49.12 | J9_2_1.31 J9_2_1.32 96.42,41.28 91.43,46.26 84.92,46.26 82.06,49.12 J5_2_1.13 | J9_1_1.32 36.42,41.28 | 36.42,41.28 31.43,46.26 | 31.43,46.26 24.92,46.26 | 24.92,46.26 22.07,49.12
P0.11_(nSrvcRqst1)  (via drill 0.2 pad 0.4)
  Top 0.18: 21.32,54.79 J5_1_1.16 21.32,54.79 | 21.32,54.79 22.07,54.04 | 22.07,54.04 v23.97,54.04 22.07,54.04 | J9_2_1.33 J9_2_1.34 | J5_2_1.16 81.31,54.79 82.07,54.04 v83.97,54.04 | 21.32,54.79 22.07,54.04 | J9_1_1.33 J9_1_1.34 J9_1_1.33
  Bottom 0.18: 24.29,53.72 v23.97,54.04 24.29,53.72 | 24.29,53.72 28.57,53.72 | 28.57,53.72 38.48,43.82 | 38.48,43.82 J9_1_1.34 38.48,43.82 | v83.97,54.04 84.29,53.72 88.58,53.72 98.48,43.82 J9_2_1.34 | 24.29,53.72 28.57,53.72 | 28.57,53.72 38.48,43.82
P0.12_(nSrvcRqst2)  (via drill 0.2 pad 0.4)
  Top 0.18: 22.86,54.52 v24.45,54.52 22.86,54.52 | 22.86,54.52 21.82,55.56 | 21.82,55.56 J5_1_1.14 21.82,55.56 | J9_2_1.36 J9_2_1.35 | v84.45,54.52 82.86,54.52 81.81,55.56 J5_2_1.14 | 22.86,54.52 21.82,55.56 | J9_1_1.36 J9_1_1.35 J9_1_1.36
  Bottom 0.18: 37.69,46.36 J9_1_1.36 37.69,46.36 | 37.69,46.36 29.53,54.52 | 29.53,54.52 v24.45,54.52 29.53,54.52 | J9_2_1.36 97.69,46.36 89.53,54.52 v84.45,54.52 | 37.69,46.36 29.53,54.52
P0.13/ADC0
  Top 0.18: J9_1_1.38 J9_1_1.37 J9_1_1.38 | 14.81,59.46 J5_1_1.42 14.81,59.46 | 14.81,59.46 15.12,59.76 | 15.12,59.76 34.29,59.76 | 34.29,59.76 37.47,56.58 | 37.47,56.58 37.47,51.55 | 37.47,51.55 40.12,48.9 | 40.12,48.9 J9_1_1.38 | J9_2_1.37 J9_2_1.38 100.11,48.9 97.47,51.55 97.47,56.58 94.29,59.76 75.12,59.76 74.81,59.46 J5_2_1.42 | 14.81,59.46 15.12,59.76 | 15.12,59.76 34.29,59.76 | 34.29,59.76 37.47,56.58 | 37.47,56.58 37.47,51.55 | 37.47,51.55 40.12,48.9 | 40.12,48.9 J9_1_1.38
P0.14/ADC1  (via drill 0.2 pad 0.4)
  Top 0.18: J9_1_1.40 J9_1_1.39 J9_1_1.40 | J9_1_1.40 40.03,51.44 | 40.03,51.44 37.94,53.53 | 37.94,53.53 37.94,57.06 | 37.94,57.06 34.77,60.23 | 34.77,60.23 v15.31,60.23 34.77,60.23 | J9_2_1.39 J9_2_1.40 100.03,51.44 97.94,53.53 97.94,57.06 94.77,60.23 v75.31,60.23 | v75.31,59.01 J5_2_1.40 | J9_1_1.40 40.03,51.44 | 40.03,51.44 37.94,53.53 | 37.94,53.53 37.94,57.06 | 37.94,57.06 34.77,60.23 | v15.31,59.01 J5_1_1.40 v15.31,59.01
  Bottom 0.18: v75.31,60.23 v75.31,59.01 | v15.31,60.23 v15.31,59.01 v15.31,60.23
P0.15/ADC2  (via drill 0.2 pad 0.4)
  Top 0.18: J9_1_1.42 J9_1_1.41 J9_1_1.42 | J9_1_1.42 40.2,54.07 | 40.2,54.07 38.42,55.85 | 38.42,55.85 38.42,57.53 | 38.42,57.53 35.24,60.71 | 35.24,60.71 v15.81,60.71 35.24,60.71 | J9_2_1.41 J9_2_1.42 100.19,54.07 98.42,55.85 98.42,57.53 95.24,60.71 v75.81,60.71 | v75.81,59.26 J5_2_1.38 | J9_1_1.42 40.2,54.07 | 40.2,54.07 38.42,55.85 | 38.42,55.85 38.42,57.53 | 38.42,57.53 35.24,60.71 | v15.81,59.26 J5_1_1.38 v15.81,59.26
  Bottom 0.18: v75.81,60.71 v75.81,59.26 | v15.81,60.71 v15.81,59.26 v15.81,60.71
P0.16/ADC3  (via drill 0.2 pad 0.4)
  Top 0.18: J9_1_1.44 J9_1_1.43 J9_1_1.44 | 35.72,61.19 v16.32,61.19 35.72,61.19 | 35.72,61.19 40.2,56.71 | 40.2,56.71 J9_1_1.44 | J9_2_1.43 J9_2_1.44 100.19,56.71 95.72,61.19 v76.31,61.19 | J5_2_1.36 v76.31,59.02 | 35.72,61.19 40.2,56.71 | 40.2,56.71 J9_1_1.44 | J5_1_1.36 v16.32,59.02 J5_1_1.36
  Bottom 0.18: v76.31,59.02 v76.31,61.19 | v16.32,59.02 v16.32,61.19 v16.32,59.02
P0.17/ADC4  (via drill 0.2 pad 0.4)
  Top 0.18: J9_1_1.46 J9_1_1.45 J9_1_1.46 | J9_1_1.46 39.91,59.06 | 39.91,59.06 37.31,61.66 | 37.31,61.66 v16.82,61.66 37.31,61.66 | J9_2_1.45 J9_2_1.46 99.91,59.06 97.31,61.66 v76.81,61.66 | v76.81,59.3 J5_2_1.34 | J9_1_1.46 39.91,59.06 | 39.91,59.06 37.31,61.66 | v16.82,59.3 J5_1_1.34 v16.82,59.3
  Bottom 0.18: v76.81,61.66 v76.81,59.3 | v16.82,61.66 v16.82,59.3 v16.82,61.66
P0.18/ADC5  (via drill 0.2 pad 0.4)
  Top 0.18: J9_1_1.48 J9_1_1.47 J9_1_1.48 | J9_1_1.48 40.2,62.14 | 40.2,62.14 v17.32,62.14 40.2,62.14 | J9_2_1.47 J9_2_1.48 100.19,62.14 v77.31,62.14 | v77.31,59.02 J5_2_1.32 | J9_1_1.48 40.2,62.14 | v17.32,59.02 J5_1_1.32 v17.32,59.02
  Bottom 0.18: v77.31,62.14 v77.31,59.02 | v17.32,62.14 v17.32,59.02 v17.32,62.14
P0.19/ADC6  (via drill 0.2 pad 0.4)
  Top 0.18: J9_1_1.50 J9_1_1.49 J9_1_1.50 | J9_1_1.50 38.67,64.14 | 38.67,64.14 37.15,62.61 | 37.15,62.61 v17.82,62.61 37.15,62.61 | J9_2_1.49 J9_2_1.50 98.67,64.14 97.15,62.61 v77.81,62.61 | v77.81,59.3 J5_2_1.30 | J9_1_1.50 38.67,64.14 | 38.67,64.14 37.15,62.61 | v17.82,59.3 J5_1_1.30 v17.82,59.3
  Bottom 0.18: v77.81,62.61 v77.81,59.3 | v17.82,62.61 v17.82,59.3 v17.82,62.61
P0.20/ADC7  (via drill 0.2 pad 0.4)
  Top 0.18: J9_1_1.52 J9_1_1.51 J9_1_1.52 | J9_1_1.52 38.83,66.68 | 38.83,66.68 35.24,63.09 | 35.24,63.09 v18.32,63.09 35.24,63.09 | J9_2_1.51 J9_2_1.52 98.83,66.68 95.24,63.09 v78.31,63.09 | v78.31,58.94 J5_2_1.28 | J9_1_1.52 38.83,66.68 | 38.83,66.68 35.24,63.09 | v18.32,58.94 J5_1_1.28 v18.32,58.94
  Bottom 0.18: v78.31,63.09 v78.31,58.94 | v18.32,63.09 v18.32,58.94 v18.32,63.09
P0.21/TRACECLK  (via drill 0.2 pad 0.4)
  Top 0.18: J9_1_1.54 J9_1_1.53 J9_1_1.54 | J9_1_1.54 39.78,69.22 | 39.78,69.22 34.13,63.57 | 34.13,63.57 v18.82,63.57 34.13,63.57 | J9_2_1.53 J9_2_1.54 99.78,69.22 94.13,63.57 v78.81,63.57 | v78.81,59.3 J5_2_1.26 | J9_1_1.54 39.78,69.22 | 39.78,69.22 34.13,63.57 | v18.82,59.3 J5_1_1.26 v18.82,59.3
  Bottom 0.18: v78.81,63.57 v78.81,59.3 | v18.82,63.57 v18.82,59.3 v18.82,63.57
P0.22/TRACED0  (via drill 0.2 pad 0.4)
  Top 0.18: J9_1_1.56 J9_1_1.55 J9_1_1.56 | J9_1_1.56 39.94,71.76 | 39.94,71.76 32.23,64.04 | 32.23,64.04 v19.32,64.04 32.23,64.04 | J9_2_1.55 J9_2_1.56 99.94,71.76 92.23,64.04 v79.31,64.04 | v79.31,59.04 J5_2_1.24 | J9_1_1.56 39.94,71.76 | 39.94,71.76 32.23,64.04 | v19.32,59.04 J5_1_1.24 v19.32,59.04
  Bottom 0.18: v79.31,64.04 v79.31,59.04 | v19.32,64.04 v19.32,59.04 v19.32,64.04
P0.23/TRACED1  (via drill 0.2 pad 0.4)
  Top 0.18: J9_1_1.58 J9_1_1.57 J9_1_1.58 | J9_1_1.58 40.1,74.3 | 40.1,74.3 30.32,64.52 | 30.32,64.52 v19.82,64.52 30.32,64.52 | J9_2_1.57 J9_2_1.58 100.1,74.3 90.32,64.52 v79.81,64.52 | v79.81,59.31 J5_2_1.22 | J9_1_1.58 40.1,74.3 | 40.1,74.3 30.32,64.52 | v19.82,59.31 J5_1_1.22 v19.82,59.31
  Bottom 0.18: v79.81,64.52 v79.81,59.31 | v19.82,64.52 v19.82,59.31 v19.82,64.52
P0.24/TRACED2  (via drill 0.2 pad 0.4)
  Top 0.18: J9_1_1.60 J9_1_1.59 J9_1_1.60 | J9_1_1.60 40.2,76.61 | 40.2,76.61 28.57,65 | 28.57,65 v20.32,65 28.57,65 | J9_2_1.59 J9_2_1.60 100.19,76.61 88.58,65 v80.31,65 | v80.31,59 J5_2_1.20 | J9_1_1.60 40.2,76.61 | 40.2,76.61 28.57,65 | v20.32,59 J5_1_1.20 v20.32,59
  Bottom 0.18: v80.31,65 v80.31,59 | v20.32,65 v20.32,59 v20.32,65
P0.25/TRACED3  (via drill 0.2 pad 0.4)
  Top 0.18: J9_1_1.62 J9_1_1.61 J9_1_1.62 | J9_1_1.62 40.2,78.52 | 40.2,78.52 27.15,65.47 | 27.15,65.47 v20.82,65.47 27.15,65.47 | J9_2_1.61 J9_2_1.62 100.19,78.52 87.15,65.47 v80.81,65.47 | v80.81,59.26 J5_2_1.18 | J9_1_1.62 40.2,78.52 | 40.2,78.52 27.15,65.47 | v20.82,59.26 J5_1_1.18 v20.82,59.26
  Bottom 0.18: v80.81,65.47 v80.81,59.26 | v20.82,65.47 v20.82,59.26 v20.82,65.47
P0.26
  Top 0.18: J9_1_1.64 J9_1_1.63 J9_1_1.64 | J9_1_1.64 19.98,81.92 | 19.98,81.92 14.31,76.25 | 14.31,76.25 J5_1_1.44 14.31,76.25 | J9_2_1.63 J9_2_1.64 79.98,81.92 74.31,76.25 J5_2_1.44 | J9_1_1.64 19.98,81.92 | 19.98,81.92 14.31,76.25
P0.27_(Wake)  (via drill 0.2 pad 0.4)
  Top 0.18: 23.07,51.68 J5_1_1.9 23.07,51.68 | 23.07,51.68 v23.1,51.71 23.07,51.68 | J9_2_1.65 J9_2_1.66 | J5_2_1.9 83.06,51.68 v83.1,51.71 | J9_1_1.65 J9_1_1.66 J9_1_1.65
  Bottom 0.18: 23.1,73.83 v23.1,51.71 23.1,73.83 | 23.1,73.83 33.72,84.46 | 33.72,84.46 J9_1_1.66 33.72,84.46 | v83.1,51.71 83.1,73.83 93.72,84.46 J9_2_1.66 | 23.1,73.83 33.72,84.46
P0.28_(HX-RQST)  (via drill 0.2 pad 0.4)
  Top 0.18: J9_1_1.68 J9_1_1.67 J9_1_1.68 | J9_1_1.68 40.2,86.92 | 40.2,86.92 v22.29,86.92 40.2,86.92 | 11.06,59.89 v11.06,76.5 11.06,59.89 | 11.06,59.89 11.31,59.64 | 11.31,59.64 J5_1_1.56 11.31,59.64 | J9_2_1.67 J9_2_1.68 100.19,86.92 v82.29,86.92 | v71.06,76.5 71.06,59.89 71.31,59.64 J5_2_1.56 | J9_1_1.68 40.2,86.92 | 11.06,59.89 11.31,59.64
  Bottom 0.18: 11.87,76.5 v22.29,86.92 11.87,76.5 | 11.87,76.5 v11.06,76.5 11.87,76.5 | v82.29,86.92 71.87,76.5 v71.06,76.5
P0.29_(HX-PGOOD)  (via drill 0.2 pad 0.4)
  Top 0.18: J9_1_1.70 J9_1_1.69 J9_1_1.70 | 11.81,59.93 J5_1_1.54 11.81,59.93 | 11.81,59.93 11.69,60.06 | 11.69,60.06 v11.69,77.55 11.69,60.06 | 23.54,89.37 v23.5,89.37 23.54,89.37 | 23.54,89.37 23.71,89.54 | 23.71,89.54 J9_1_1.70 | J9_2_1.69 J9_2_1.70 83.71,89.54 83.54,89.37 v83.5,89.37 | J5_2_1.54 71.81,59.93 71.69,60.06 v71.69,77.55 | 11.81,59.93 11.69,60.06 | 23.54,89.37 23.71,89.54 | 23.71,89.54 J9_1_1.70
  Bottom 0.18: v71.69,77.55 v83.5,89.37 | v11.69,77.55 v23.5,89.37 v11.69,77.55
P0.30_HX-SCL
  Top 0.18: J9_1_1.71 J9_1_1.72 J9_1_1.71 | J9_1_1.71 43.77,92.08 | 43.77,92.08 44.22,92.53 | 44.22,92.53 44.22,95.38 | 44.22,95.38 43.7,95.89 | 43.7,95.89 28.25,95.89 | 28.25,95.89 12.31,79.96 | 12.31,79.96 J5_1_1.52 12.31,79.96 | J9_2_1.72 J9_2_1.71 103.77,92.08 104.22,92.53 104.22,95.38 103.7,95.89 88.25,95.89 72.31,79.96 J5_2_1.52 | J9_1_1.71 43.77,92.08 | 43.77,92.08 44.22,92.53 | 44.22,92.53 44.22,95.38 | 44.22,95.38 43.7,95.89 | 43.7,95.89 28.25,95.89 | 28.25,95.89 12.31,79.96
P0.31_HX-SDA
  Top 0.18: J9_1_1.74 J9_1_1.73 J9_1_1.74 | J9_1_1.74 27.97,94.62 | 27.97,94.62 12.81,79.46 | 12.81,79.46 J5_1_1.50 12.81,79.46 | J9_2_1.73 J9_2_1.74 87.97,94.62 72.81,79.46 J5_2_1.50 | J9_1_1.74 27.97,94.62 | 27.97,94.62 12.81,79.46
PWR-OFF  (via drill 0.2 pad 0.4)
  Top 0.18: J9_1_1.4 J9_1_1.3 J9_1_1.4 | J9_1_1.4 35.78,5.72 | 35.78,5.72 32.54,8.96 | 32.54,8.96 v32.54,11.18 32.54,8.96 | 31.27,47.85 v32.54,46.58 31.27,47.85 | 31.27,47.85 24.76,47.85 | 24.76,47.85 23.57,49.05 | 23.57,49.05 J5_1_1.7 23.57,49.05 | J9_2_1.3 J9_2_1.4 95.78,5.72 92.54,8.96 v92.54,11.18 | v92.54,46.58 91.27,47.85 84.76,47.85 83.56,49.05 J5_2_1.7 | J9_1_1.4 35.78,5.72 | 35.78,5.72 32.54,8.96 | 31.27,47.85 24.76,47.85 | 24.76,47.85 23.57,49.05
  Bottom 0.18: v92.54,11.18 v92.54,46.58 | v32.54,11.18 v32.54,46.58 v32.54,11.18
S$1  (via drill 0.2 pad 0.4)
  other vias: 22.7,33.35
S$1  (via drill 0.2 pad 0.4)
  other vias: 82.7,33.35
Status-ON/OFF  (via drill 0.2 pad 0.4)
  Top 0.18: J9_1_1.8 J9_1_1.7 J9_1_1.8 | J9_1_1.8 37.85,10.8 | 37.85,10.8 v36.51,12.13 37.85,10.8 | 36.51,56.58 v36.51,44.99 36.51,56.58 | 36.51,56.58 33.81,59.28 | 33.81,59.28 24.72,59.28 | 24.72,59.28 24.32,58.88 | 24.32,58.88 J5_1_1.4 24.32,58.88 | J9_2_1.7 J9_2_1.8 97.85,10.8 v96.51,12.13 | v96.51,44.99 96.51,56.58 93.81,59.28 84.72,59.28 84.31,58.88 J5_2_1.4 | J9_1_1.8 37.85,10.8 | 36.51,56.58 33.81,59.28 | 33.81,59.28 24.72,59.28 | 24.72,59.28 24.32,58.88
  Bottom 0.18: v96.51,12.13 v96.51,44.99 | v36.51,12.13 v36.51,44.99 v36.51,12.13

## Text on the board
tPlace: VDD | VDD | VIO | VIO | GND | GND | P0.31 HX-SDA | P0.31 HX-SDA | P0.30 HX-SCL | P0.30 HX-SCL | P0.29 HX-Ctrl | P0.29 HX-Ctrl | P0.28 HX-Rqst | P0.28 HX-Rqst | P0.27 Wake | P0.27 Wake | MTC.2 N9151 Breakout | MTC.2 N9151 Breakout | P0.26 | P0.26 | P0.25/TraceDat3 | P0.25/TraceDat3 | P0.24/TraceDat2 | P0.24/TraceDat2 | P0.23/TraceDat1 | P0.23/TraceDat1 | P0.22/TraceDat0 | P0.22/TraceDat0 | P0.21/TraceClk | P0.21/TraceClk | P0.20/ADC7 | P0.20/ADC7 | P0.19/ADC6 | P0.19/ADC6 | P0.18/ADC5 | P0.18/ADC5 | P0.17/ADC4 | P0.17/ADC4 | P0.16/ADC3 | P0.16/ADC3 | P0.15/ADC2 | P0.15/ADC2 | RESET | P0.14/ADC1 | RESET | P0.14/ADC1 | P0.13/ADC0 | P0.13/ADC0 | P0.12 SrvcRqst2 | P0.12 SrvcRqst2 | P0.11 SrvcRqst1 | P0.11 SrvcRqst1 | SWD | P0.10 SPI-MOSI | SWD | P0.10 SPI-MOSI | P0.09 SPI-MISO | P0.09 SPI-MISO | P0.08 SPI-CLK | P0.08 SPI-CLK | P0.07 SPI-CS1 | P0.07 SPI-CS1 | P0.06 SPI-CS2 | P0.06 SPI-CS2 | P0.05 UART-TX | P0.05 UART-TX | P0.04 UART-RX | P0.04 UART-RX | P0.03 UART-RTS | P0.03 UART-RTS | P0.02 UART-CTS | P0.02 UART-CTS | P0.01 I2C-SDA | P0.01 I2C-SDA | P0.00 I2C-SCL | P0.00 I2C-SCL | Cut JP for / N9151 switched / power control | Cut JP for / N9151 switched / power control | !SysReset | !SysReset | PwrStatus | PwrStatus | Pwr ON/Tggl | Pwr ON/Tggl | Pwr OFF | Pwr OFF | GND | GND
bPlace: MTC2-N9151-BRK rev2.2a | MTC2-N9151-BRK rev2.2a
tDocu: MH1 | MH1 | J5 | J5 | SW1 | SW1 | R2 | R2 | R1 | R1 | C1 | J9 | C1 | J9 | J1 | J1 | JP1 | JP1